# Altium PCB 1-1D 模组应用接线示例PCB.PcbDoc
Units mil, origin at the board's own origin, x right, y up, seen from the top; angles counter-clockwise.
Board outline 3230 x 1832.56 mil, 2 copper layers (Top Layer, Bottom Layer), stack 62.205 mil thick; 42 components, 0 nets, 237 pads, 0 vias.
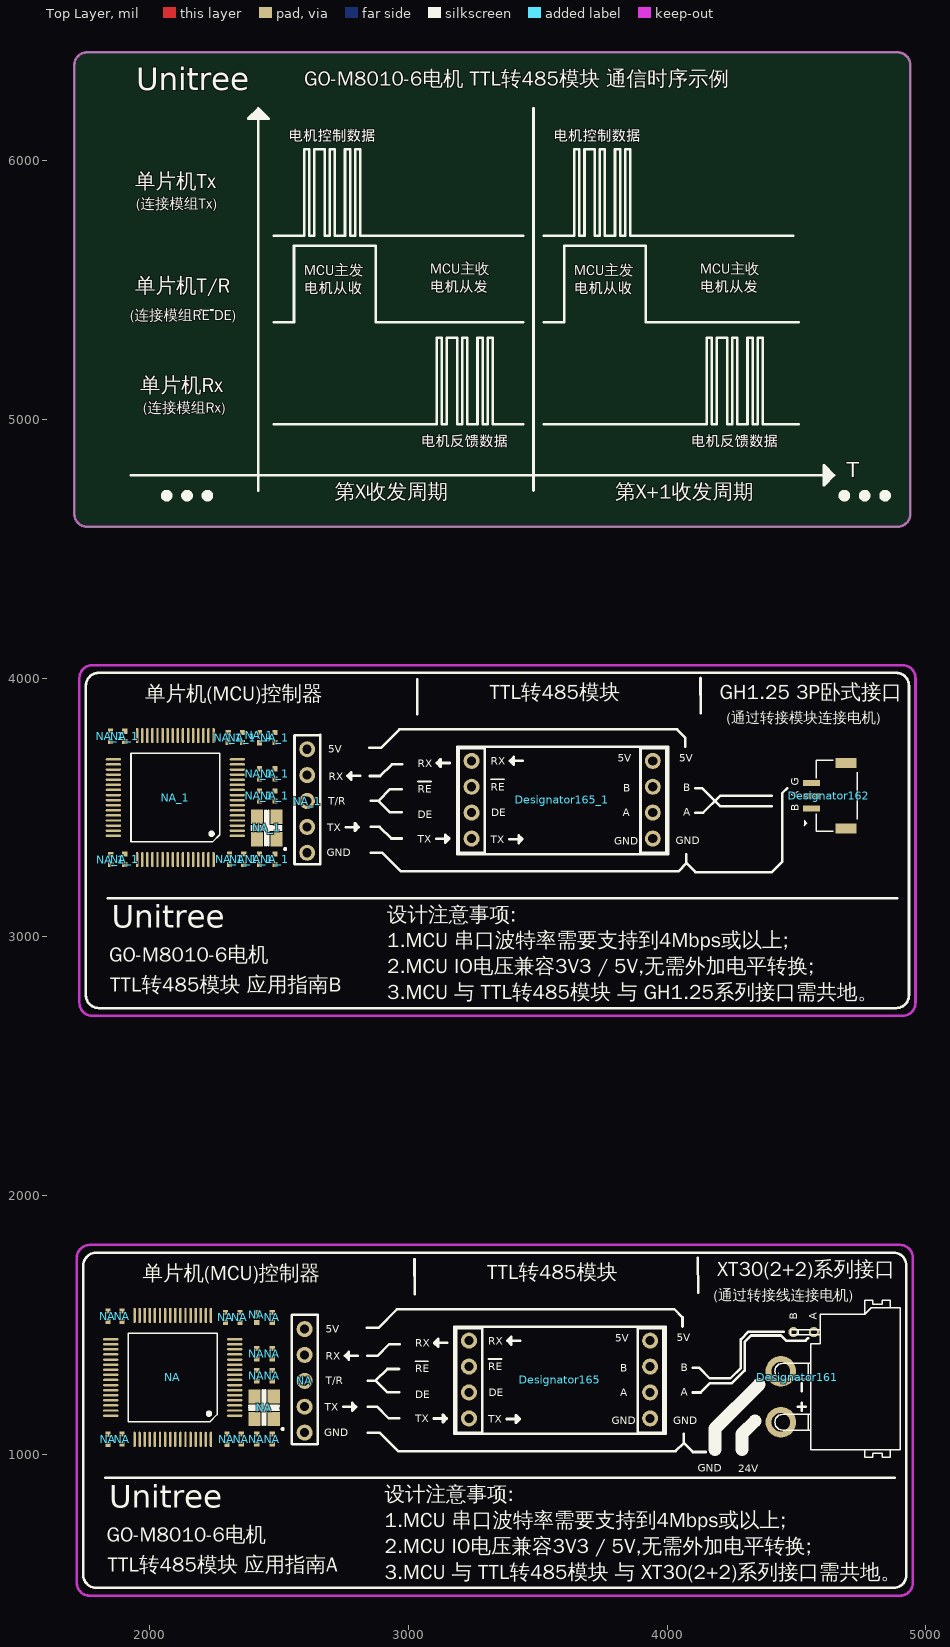
[diagram p0: Top Layer view]
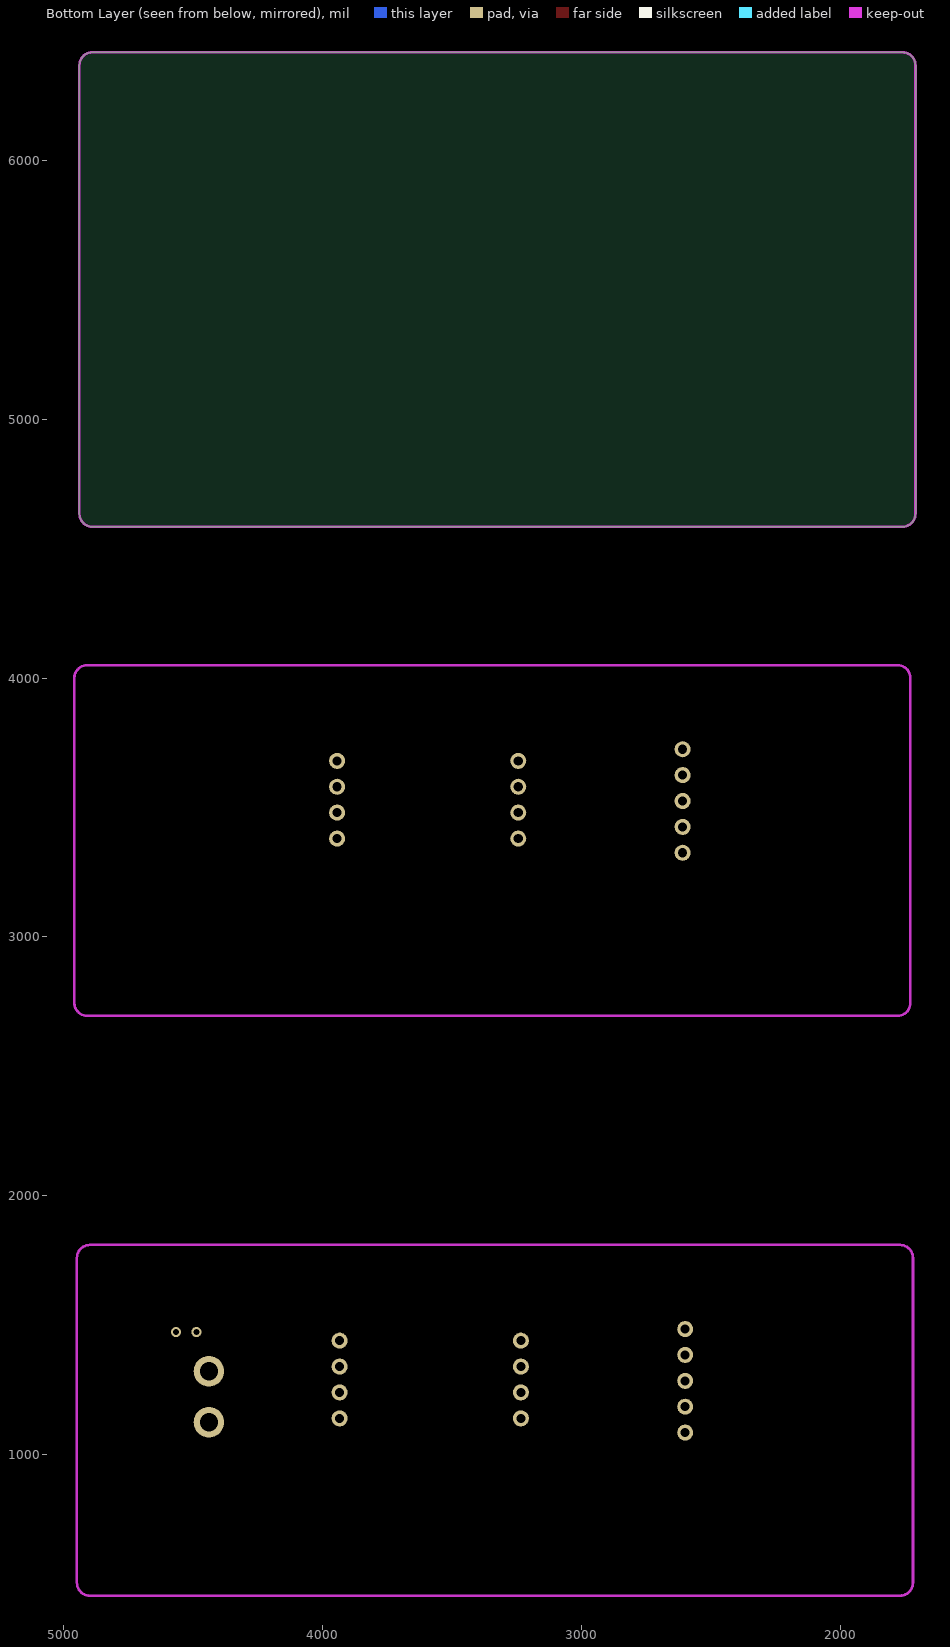
[diagram p1: Bottom Layer view, seen from below]

## Layer stack, top to bottom
Top Solder: solder mask 0.3937, Solder Resist, Dk 3.5
Top Layer: signal copper 1.1811
Dielectric 1: dielectric 59.8425, FR-4, Dk 4.8
Bottom Layer: signal copper 1.1811
Bottom Solder: solder mask 0.3937, Solder Resist, Dk 3.5

## Board outline
1710.31,4634.76 1710.31,6367.32 cw(c1760.31,6367.32) 1760.31,6417.32 4890.31,6417.32 cw(c4890.31,6367.32) 4940.31,6367.32 4940.31,4634.76 cw(c4890.31,4634.76) 4890.31,4584.76 1760.31,4584.76 cw(c1760.31,4634.76)

## Design rules (kind name [scope] priority, off if disabled: settings)
Clearance [All] p1: gap=10 ignorepadtopadclearanceinfootprint=FALSE except(0: Arc-Hole Track-Hole SMDPad-Hole THPad-Hole Via-Hole Fill-Hole Poly-Hole Region-Hole Text-Hole)
PolygonConnect [All] p1: connectstyle=Relief reliefconductorwidth=10 reliefentries=4 polygonreliefangle="90 Angle" airgapwidth=10
RoutingVias [All] p1: holewidth=28 width=50 viastyle="Through Hole" minholewidth=28 minwidth=50 maxholewidth=28 maxwidth=50
SolderMaskExpansion [All] p1: expansion=4 istentingtop=FALSE
Width [All] p1: maxlimit=10 minlimit=10 preferedwidth=10
30 further rules are at their usual default settings.

## Components (designator, comment, footprint, x,y, rotation, side; value= is the part's Value field where it differs from the comment)
Designator161 "Comment" "XT30PW(2+2)-M 卧式" 4440,1125 r90 top
Designator162 "Comment" "GH_1.25_3P 卧贴" 4625,3545 r90 top
Designator165 "Comment" YS_TTL_TO_485_MODULE 3235,1440 r0 top
Designator165_1 "Comment" YS_TTL_TO_485_MODULE 3245,3680 r0 top
NA "NA" "Header 5" 2600,1485 r270 top (schematic designator #4)
NA "NA" 0402_C 1895,1534.69 r90 top (schematic designator C13)
NA "NA" 0402_C 1840,1535 r90 top (schematic designator C14)
NA "NA" 0402_C 1840.91,1058.78 r90 top (schematic designator C15)
NA "NA" 0402_C 2475,1304.69 r90 top (schematic designator C16)
NA "NA" 0402_C 2475,1389.84 r270 top (schematic designator C17)
NA "NA" 0402_C 2300,1059.69 r90 top (schematic designator C18)
NA "NA" 0402_C 2350,1530 r270 top (schematic designator C19)
NA "NA" 0402_C 2475,1060 r90 top (schematic designator C20)
NA "NA" 0402_C 2415,1060 r90 top (schematic designator C21)
NA "NA" 0402_C 2295,1530 r270 top (schematic designator C22)
NA "NA" 0402_C 2415,1389.84 r270 top (schematic designator C23)
NA "NA" 0402_C 1895,1060 r90 top (schematic designator C24)
NA "NA" LED_0402 2415,1530 r90 top (schematic designator LED1)
NA "NA" 0402_R 2355,1060 r270 top (schematic designator R8)
NA "NA" 0402_R 2475,1530 r90 top (schematic designator R9)
NA "NA" 0402_R 2415,1304.68 r90 top (schematic designator R10)
NA "NA" LQFP64 2090.51,1298.27 r180 top (schematic designator U4)
NA "NA" XTAL_3225 2443.58,1180.75 r90 top (schematic designator XT1)
NA_1 "NA" XTAL_3225 2453.58,3420.75 r90 top (schematic designator XT1)
NA_1 "NA" LQFP64 2100.51,3538.27 r180 top (schematic designator U4)
NA_1 "NA" 0402_R 2425,3544.68 r90 top (schematic designator R10)
NA_1 "NA" 0402_R 2485,3770 r90 top (schematic designator R9)
NA_1 "NA" 0402_R 2365,3300 r270 top (schematic designator R8)
NA_1 "NA" LED_0402 2425,3770 r90 top (schematic designator LED1)
NA_1 "NA" 0402_C 1905,3300 r90 top (schematic designator C24)
NA_1 "NA" 0402_C 2425,3629.84 r270 top (schematic designator C23)
NA_1 "NA" 0402_C 2305,3770 r270 top (schematic designator C22)
NA_1 "NA" 0402_C 2425,3300 r90 top (schematic designator C21)
NA_1 "NA" 0402_C 2485,3300 r90 top (schematic designator C20)
NA_1 "NA" 0402_C 2360,3770 r270 top (schematic designator C19)
NA_1 "NA" 0402_C 2310,3299.69 r90 top (schematic designator C18)
NA_1 "NA" 0402_C 2485,3629.84 r270 top (schematic designator C17)
NA_1 "NA" 0402_C 2485,3544.69 r90 top (schematic designator C16)
NA_1 "NA" 0402_C 1850.91,3298.78 r90 top (schematic designator C15)
NA_1 "NA" 0402_C 1850,3775 r90 top (schematic designator C14)
NA_1 "NA" 0402_C 1905,3774.69 r90 top (schematic designator C13)
NA_1 "NA" "Header 5" 2610,3725 r270 top (schematic designator #4)

## Footprints (in the part's own frame and the unit in brackets; to place one, negate y for a bottom-side part, rotate by r counter-clockwise, add the part's x,y. Pads: shape width x height; smd on the part's side, far side on the other; paste and mask are expansions set on the pad)
0402_C [mm]
  rect 0.5x0.5 smd mask+0.051: 1(-0.5,0) 2(0.5,0)
  body extent -0.5,-0.3 0.5,0.3, height 0.2
0402_R [mm]
  rect 0.5x0.5 smd mask+0.051: 1(-0.5,0) 2(0.5,0)
  body extent -0.57,-0.27 0.58,0.28, height 0.41
"GH_1.25_3P 卧贴" [mm]
  rect 0.6x1.7 smd: 1(-1.25,1.689) 2(0,1.689) 3(1.25,1.689)
  rect 1x2.1 smd: ""(-3.216,-1.689) ""(3.216,-1.689)
  silkscreen extent -3.5,-2.77 3.5,2.41, body extent -3.5,-2.79 3.5,2.06, height 4.35
"Header 5" [mil]
  round 62 hole 35: 1(0,0) 2(100,0) 3(200,0) 4(300,0) 5(400,0)
  silkscreen extent -55,-49 445,51
LED_0402 [mm]
  round 0.3 on Top Overlay mask+0.1: 0(1,0)
  rect 0.5x0.5 smd: 1(-0.508,0) 2(0.492,0)
  silkscreen extent -0.08,-0.2 0.07,0.2, body extent -0.5,-0.25 0.51,0.25, height 0.45
LQFP64 [mm]
  oval 1.5x0.241 smd: 1(-6.083,3.75) 2(-6.083,3.25) 3(-6.083,2.75) 4(-6.083,2.25) 5(-6.083,1.75) 6(-6.083,1.25) 7(-6.083,0.75) 8(-6.083,0.25) 9(-6.083,-0.25) 10(-6.083,-0.75) 11(-6.083,-1.25) 12(-6.083,-1.75) 13(-6.083,-2.25) 14(-6.083,-2.75) 15(-6.083,-3.25) 16(-6.083,-3.75) 33(6.083,-3.75) 34(6.083,-3.25) 35(6.083,-2.75) 36(6.083,-2.25) 37(6.083,-1.75) 38(6.083,-1.25) 39(6.083,-0.75) 40(6.083,-0.25) 41(6.083,0.25) 42(6.083,0.75) 43(6.083,1.25) 44(6.083,1.75) 45(6.083,2.25) 46(6.083,2.75) 47(6.083,3.25) 48(6.083,3.75)
  oval 0.241x1.5 smd: 17(-3.75,-6.083) 18(-3.25,-6.083) 19(-2.75,-6.083) 20(-2.25,-6.083) 21(-1.75,-6.083) 22(-1.25,-6.083) 23(-0.75,-6.083) 24(-0.25,-6.083) 25(0.25,-6.083) 26(0.75,-6.083) 27(1.25,-6.083) 28(1.75,-6.083) 29(2.25,-6.083) 30(2.75,-6.083) 31(3.25,-6.083) 32(3.75,-6.083) 49(3.75,6.083) 50(3.25,6.083) 51(2.75,6.083) 52(2.25,6.083) 53(1.75,6.083) 54(1.25,6.083) 55(0.75,6.083) 56(0.25,6.083) 57(-0.25,6.083) 58(-0.75,6.083) 59(-1.25,6.083) 60(-1.75,6.083) 61(-2.25,6.083) 62(-2.75,6.083) 63(-3.25,6.083) 64(-3.75,6.083)
  silkscreen extent -4.35,-4.35 4.35,4.35, body extent -6.07,-6.07 6.07,6.07, height 1.62
"XT30PW(2+2)-M 卧式" [mm]
  round 1 hole 0.6: 1(8.85,-3.23) 2(8.85,-1.23)
  round 3 hole 1.8: 3(5,0) 4(0,0)
  silkscreen extent -3.45,-11.73 11.96,0.59, body extent -3.46,-11.7 11.95,0.62, height 5.22
XTAL_3225 [mm]
  rect 1.4x1.2 smd paste-0.051 mask+0.051: 1(-1.1,-0.952) 2(1.1,-0.952) 3(1.1,0.952) 4(-1.1,0.952)
  silkscreen extent -2.15,-1.89 1.73,1.47, body extent -1.65,-1.3 1.65,1.3, height 1.1
YS_TTL_TO_485_MODULE [mil]
  round 62 hole 35: 1(0,0) 2(0,-100) 3(0,-200) 4(0,-300) 5(700,-300) 6(700,-200) 7(700,-100) 8(700,0)
  silkscreen extent -56,-360 759,54, body extent -55,-359 760,55, height 232

## Part data
NA NA_1: library part "Header 5", "Header, 5-Pin", LatestRevisionDate=17-Jul-2002, LatestRevisionNote="Re-released for DXP Platform.", Publisher="Altium Limited"
NA NA NA NA NA NA NA NA_1 NA_1 NA_1 NA_1 NA_1 NA_1 NA_1: library part Cap_SMT_Sig, "50V,±10%,X7R,0402,贴片电容", LatestRevisionDate=17-Jul-2002, LatestRevisionNote="Re-released for DXP Platform.", PackageDescription="Polarized Capacitor (Radial); 2 Leads", PackageReference=RB7.6-15, Published=8-Jun-2000, Publisher="Altium Limited"
NA NA NA NA NA NA_1 NA_1 NA_1 NA_1 NA_1: library part Cap_SMT_Sig, "16V,±10%,X7R,0402,贴片电容", LatestRevisionDate=17-Jul-2002, LatestRevisionNote="Re-released for DXP Platform.", PackageDescription="Polarized Capacitor (Radial); 2 Leads", PackageReference=RB7.6-15, Published=8-Jun-2000, Publisher="Altium Limited"
NA NA_1: library part LED, "绿灯,0402,贴片LED", DatasheetVersion=16-Apr-2002, LatestRevisionDate=17-Dec-2003, LatestRevisionNote="PCB Footprint replaced.", PackageDescription="SM LED; 2 C-Bend Leads; Body 3.5 x 2.8 x 1.9 mm, inc leads (LxWxH typ)", PackageReference=3.5X2.8X1.9, PackageVersion=16-Apr-2002, Published=8-Jun-2000, Publisher="Altium Limited"
NA NA NA NA_1 NA_1 NA_1: library part Res_SMT, "1/16W,1%,0402,贴片电阻", LatestRevisionDate=17-Jul-2002, LatestRevisionNote="Re-released for DXP Platform.", PackageDescription="Axial Device, Thru-Hole; 2 Leads; 0.4 in Pin Spacing", PackageReference=AXIAL-0.4, Published=8-Jun-2000, Publisher="Altium Limited"
NA NA_1: library part STM32F405R, "MCU", Package=LQFP-64
NA NA_1: library part XTAL_有源, "有源,3V3,4P,108℃,3225,贴片晶振", Package=3225

## Nets (pads, with @x,y where several pads share a name; then routed paths per layer and width w, separated by ;. In a path a pad name is that pad's centre, name@x,y a point inside that pad or via, vN(x,y) a via of type N, cw(c..) or ccw(c..) an arc to the next point about the centre after c; other vN are vias at no path point)
pads on no net: Designator161.1 Designator161.2 Designator161.3 Designator161.4 Designator162. Designator162.1 Designator162.2 Designator162.3 Designator165.1 Designator165.2 Designator165.3 Designator165.4 Designator165.5 Designator165.6 Designator165.7 Designator165.8 Designator165_1.1 Designator165_1.2 Designator165_1.3 Designator165_1.4 Designator165_1.5 Designator165_1.6 Designator165_1.7 Designator165_1.8 NA.0 NA.1 NA.2 NA.3 NA.4 NA.5 NA.6 NA.7 NA.8 NA.9 NA.10 NA.11 NA.12 NA.13 NA.14 NA.15 NA.16 NA.17 NA.18 NA.19 NA.20 NA.21 NA.22 NA.23 NA.24 NA.25 NA.26 NA.27 NA.28 NA.29 NA.30 NA.31 NA.32 NA.33 NA.34 NA.35 NA.36 NA.37 NA.38 NA.39 NA.40 NA.41 NA.42 NA.43 NA.44 NA.45 NA.46 NA.47 NA.48 NA.49 NA.50 NA.51 NA.52 NA.53 NA.54 NA.55 NA.56 NA.57 NA.58 NA.59 NA.60 NA.61 NA.62 NA.63 NA.64 NA_1.0 NA_1.1 NA_1.2 NA_1.3 NA_1.4 NA_1.5 NA_1.6 NA_1.7 NA_1.8 NA_1.9 NA_1.10 NA_1.11 NA_1.12 NA_1.13 NA_1.14 NA_1.15 NA_1.16 NA_1.17 NA_1.18 NA_1.19 NA_1.20 NA_1.21 NA_1.22 NA_1.23 NA_1.24 NA_1.25 NA_1.26 NA_1.27 NA_1.28 NA_1.29 NA_1.30 NA_1.31 NA_1.32 NA_1.33 NA_1.34 NA_1.35 NA_1.36 NA_1.37 NA_1.38 NA_1.39 NA_1.40 NA_1.41 NA_1.42 NA_1.43 NA_1.44 NA_1.45 NA_1.46 NA_1.47 NA_1.48 NA_1.49 NA_1.50 NA_1.51 NA_1.52 NA_1.53 NA_1.54 NA_1.55 NA_1.56 NA_1.57 NA_1.58 NA_1.59 NA_1.60 NA_1.61 NA_1.62 NA_1.63 NA_1.64

## Keep-outs
Keep-Out Layer:
  lines w10: 1710.31,4634.76 ccw(c1760.31,4634.76) 1760.31,4584.76 4890.31,4584.76 ccw(c4890.31,4634.76) 4940.31,4634.76 4940.31,5889.76 4940.31,6367.32 ccw(c4890.31,6367.32) 4890.31,6417.32 1760.31,6417.32 ccw(c1760.31,6367.32) 1710.31,6367.32 1710.31,5864.76 1710.31,4634.76 ; 1720,505 ccw(c1770,505) 1770,455 4900,455 ccw(c4900,505) 4950,505 4950,1760 ccw(c4900,1760) 4900,1810 1770,1810 ccw(c1770,1760) 1720,1760 1720,1735 1720,505 ; 1730,2745 ccw(c1780,2745) 1780,2695 4910,2695 ccw(c4910,2745) 4960,2745 4960,4000 ccw(c4910,4000) 4910,4050 1780,4050 ccw(c1780,4000) 1730,4000 1730,3975 1730,2745

## Silkscreen, mask and mechanical layers (free items; w line width, h text height)
Top Overlay:
  drawing of 246 lines, arcs and shapes, not listed
  text "GO-M8010-6电机 TTL转485模块 通信时序示例" at 2598.43,6268.91 h100
  text "Unitree" at 1948.82,6241.68 h150
  text "电机控制数据" at 2539.37,6062.99 h70
  text "电机控制数据" at 3562.99,6062.99 h70
  text "单片机Tx" at 1945.63,5872.25 h100
  text "(连接模组Tx)" at 1948.82,5800.3 h70
  text "MCU主收 / 电机从发" at 3085.44,5478.98 h70
  text "MCU主收 / 电机从发" at 4128.75,5478.98 h70
  text "MCU主发 / 电机从收" at 2598.43,5472.44 h70
  text "MCU主发 / 电机从收" at 3641.73,5472.44 h70
  text "单片机T/R" at 1945.63,5469.49 h100
  text "(连接模组RE DE)" at 1926.85,5368.01 h70
  text "单片机Rx" at 1965.31,5084.85 h100
  text "(连接模组Rx)" at 1976.03,5011.92 h70
  text "电机反馈数据" at 3051.18,4881.89 h70
  text "电机反馈数据" at 4094.49,4881.89 h70
  text "T" at 4695.19,4755.77 h100
  text "第X收发周期" at 2716.54,4674.05 h100
  text "第X+1收发周期" at 3799.21,4674.05 h100
  text "TTL转485模块" at 3315,3898.7 h100
  text "GH1.25 3P卧式接口" at 4204.35,3898.91 h100
  text "单片机(MCU)控制器" at 1985,3893.41 h100
  text "(通过转接模块连接电机)" at 4230,3812.9 h70
  text "5V" at 2691,3711 h30
  text "5V" at 4047.48,3677.55 h30
  text "RX" at 3037.4,3656.13 h30
  text "RX" at 2692.4,3606.13 h30
  text "B" at 4062.5,3562.85 h30
  text "RE" at 3037.4,3557.2 h30
  text "T/R" at 2691,3511 h30
  text "A" at 4062.2,3467.72 h30
  text "DE" at 3037.5,3457.85 h30
  text "TX" at 2687.4,3409.08 h30
  text "TX" at 3037.4,3364.08 h30
  text "GND" at 4033.51,3358.13 h30
  text "GND" at 2686,3311 h30
  text "Unitree" at 1855,3006.53 h150
  text "GO-M8010-6电机" at 1845,2884.07 h100
  text "TTL转485模块 应用指南B" at 1850,2768.7 h100
  text "设计注意事项: / 1.MCU 串口波特率需要支持到4Mbps或以上; / 2.MCU IO电压兼容3V3 / 5V,无需外加电平转换; / 3.MCU 与 TTL转485模块 与 GH1.25系列接口需共地。" at 2920,2740 h100
  text "XT30(2+2)系列接口" at 4194.35,1669.27 h100
  text "TTL转485模块" at 3305,1658.69 h100
  text "单片机(MCU)控制器" at 1975,1653.41 h100
  text "(通过转接线连接电机)" at 4180,1582.9 h70
  text "5V" at 2681,1471 h30
  text "5V" at 4037.48,1437.55 h30
  text "RX" at 3027.4,1416.13 h30
  text "RX" at 2682.4,1366.13 h30
  text "B" at 4052.5,1322.85 h30
  text "RE" at 3027.4,1317.2 h30
  text "T/R" at 2681,1271 h30
  text "A" at 4052.2,1227.72 h30
  text "DE" at 3027.5,1217.85 h30
  text "TX" at 2677.4,1169.08 h30
  text "TX" at 3027.4,1124.08 h30
  text "GND" at 4023.51,1118.13 h30
  text "GND" at 2676,1071 h30
  text "GND" at 4118.51,933.13 h30
  text "24V" at 4276,931 h30
  text "Unitree" at 1845,766.53 h150
  text "GO-M8010-6电机" at 1835,644.07 h100
  text "TTL转485模块 应用指南A" at 1840,528.7 h100
  text "设计注意事项: / 1.MCU 串口波特率需要支持到4Mbps或以上; / 2.MCU IO电压兼容3V3 / 5V,无需外加电平转换; / 3.MCU 与 TTL转485模块 与 XT30(2+2)系列接口需共地。" at 2910,500 h100

## Text inside footprints (layer, text, board x,y; h text height)
Designator161: Top Overlay "B" at 4504,1521 h30 r90; Top Overlay "A" at 4579,1521 h30 r90
Designator162: Top Overlay "G" at 4509.29,3584.05 h30 r90; Top Overlay "A" at 4509,3536 h30 r90; Top Overlay "B" at 4509,3486 h30 r90
Designator165: Top Overlay "A" at 3819.7,1225.88 h30; Top Overlay "B" at 3820,1321 h30; Top Overlay "5V" at 3799.98,1435.71 h30; Top Overlay "GND" at 3786.01,1116.28 h30; Top Overlay "TX" at 3309.9,1122.23 h30; Top Overlay "DE" at 3311,1226 h30; Top Overlay "RE" at 3309.9,1325.36 h30; Top Overlay "RX" at 3309.9,1424.28 h30
Designator165_1: Top Overlay "RX" at 3319.9,3664.28 h30; Top Overlay "RE" at 3319.9,3565.36 h30; Top Overlay "DE" at 3321,3466 h30; Top Overlay "TX" at 3319.9,3362.23 h30; Top Overlay "GND" at 3796.01,3356.28 h30; Top Overlay "5V" at 3809.98,3675.71 h30; Top Overlay "B" at 3830,3561 h30; Top Overlay "A" at 3829.7,3465.88 h30